# Altium PCB ZYL2(1).PcbDoc (part 2 of 2)
Units mm, origin at the board's own origin, x right, y up, seen from the top; angles counter-clockwise.
Board outline 152.4 x 101.6 mm, 2 copper layers (Top Layer, Bottom Layer); 55 components, 21 nets, 1137 pads, 477 vias.
Unrouted connection lines stored in the file: 165.
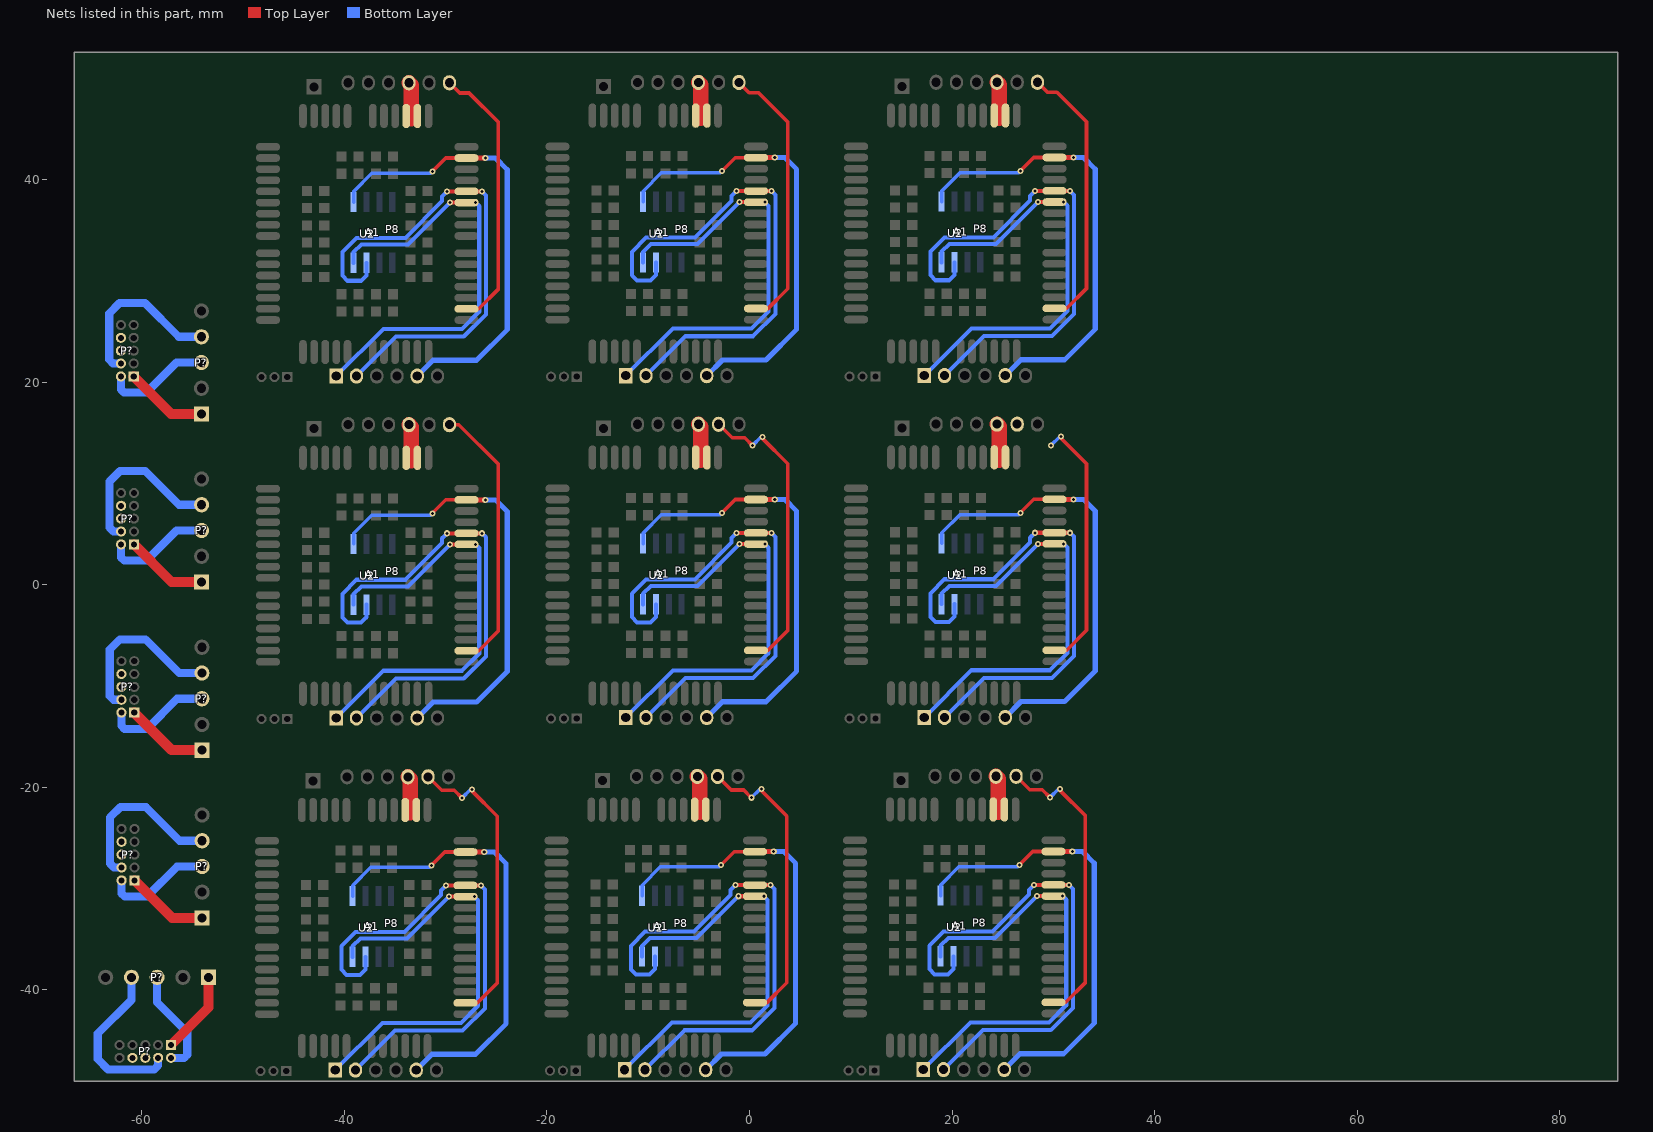
[diagram p2: the nets of this part, all layers, seen from the top]

## Via types
v1: diameter 0.65, hole 0.35, Top Layer to Bottom Layer, tented both sides, 377 vias
v2: diameter 0.6, hole 0.3, Top Layer to Bottom Layer, tented both sides, 100 vias

## Nets (pads, with @x,y where several pads share a name; then routed paths per layer and width w, separated by ;. In a path a pad name is that pad's centre, name@x,y a point inside that pad or via, vN(x,y) a via of type N, cw(c..) or ccw(c..) an arc to the next point about the centre after c; other vN are vias at no path point) (continued)
SIM_GND: A1.1 P8.5 U2.42 | length 401.7
  Top Layer w0.35: v2(-31.42,-27.717) -30.092,-26.389 U2.42@-28.046,-26.389 ; v2(-31.318,7.056) -29.991,8.384 U2.42@-27.945,8.384 ; v2(-31.318,40.813) -29.991,42.14 U2.42@-27.945,42.14 ; v2(-2.837,-27.681) -1.509,-26.354 U2.42@0.537,-26.354 ; v2(-2.735,7.091) -1.407,8.419 U2.42@0.639,8.419 ; v2(-2.735,40.848) -1.407,42.176 U2.42@0.639,42.176 ; v2(26.644,-27.666) 27.972,-26.338 U2.42@30.018,-26.338 ; v2(26.746,7.107) 28.074,8.435 U2.42@30.12,8.435 ; v2(26.746,40.863) 28.074,42.191 U2.42@30.12,42.191
  Top Layer w0.5: U2.42@-28.046,-26.389 v2(-26.195,-26.389) ; U2.42@-27.945,8.384 v2(-26.094,8.384) ; U2.42@-27.945,42.14 v2(-26.094,42.14) ; U2.42@0.537,-26.354 v2(2.388,-26.354) ; U2.42@0.639,8.419 v2(2.49,8.419) ; U2.42@0.639,42.176 v2(2.49,42.176) ; U2.42@30.018,-26.338 v2(31.869,-26.338) ; U2.42@30.12,8.435 v2(31.971,8.435) ; U2.42@30.12,42.191 v2(31.971,42.191)
  Bottom Layer w0.35: A1.1@-39.192,-30.739 -39.192,-29.698 -37.389,-27.894 -31.598,-27.894 v2(-31.42,-27.717) ; A1.1@-39.091,4.033 -39.091,5.075 -37.287,6.878 -31.496,6.878 v2(-31.318,7.056) ; A1.1@-39.091,37.79 -39.091,38.831 -37.287,40.635 -31.496,40.635 v2(-31.318,40.813) ; A1.1@-10.609,-30.704 -10.609,-29.663 -8.806,-27.859 -3.014,-27.859 v2(-2.837,-27.681) ; A1.1@-10.507,4.069 -10.507,5.11 -8.704,6.913 -2.913,6.913 v2(-2.735,7.091) ; A1.1@-10.507,37.825 -10.507,38.867 -8.704,40.67 -2.913,40.67 v2(-2.735,40.848) ; A1.1@18.872,-30.688 18.872,-29.647 20.675,-27.844 26.467,-27.844 v2(26.644,-27.666) ; A1.1@18.974,4.084 18.974,5.126 20.777,6.929 26.568,6.929 v2(26.746,7.107) ; A1.1@18.974,37.841 18.974,38.882 20.777,40.686 26.568,40.686 v2(26.746,40.863)
  Bottom Layer w0.5: P8.5@-32.913,-47.919 -31.354,-46.36 -27.051,-46.36 -24.029,-43.338 -24.029,-27.539 -25.179,-26.389 v2(-26.195,-26.389) ; P8.5@-32.811,-13.146 -31.253,-11.588 -26.95,-11.588 -23.927,-8.565 -23.927,7.234 -25.077,8.384 v2(-26.094,8.384) ; P8.5@-32.811,20.61 -31.253,22.169 -26.95,22.169 -23.927,25.192 -23.927,40.99 -25.077,42.14 v2(-26.094,42.14) ; P8.5@-4.33,-47.884 -2.771,-46.325 1.532,-46.325 4.555,-43.302 4.555,-27.504 3.405,-26.354 v2(2.388,-26.354) ; P8.5@-4.228,-13.111 -2.669,-11.552 1.634,-11.552 4.656,-8.53 4.656,7.269 3.506,8.419 v2(2.49,8.419) ; P8.5@-4.228,20.645 -2.669,22.204 1.634,22.204 4.656,25.227 4.656,41.026 3.506,42.176 v2(2.49,42.176) ; P8.5@25.151,-47.868 26.71,-46.309 31.013,-46.309 34.036,-43.287 34.036,-27.488 32.886,-26.338 v2(31.869,-26.338) ; P8.5@25.253,-13.096 26.812,-11.537 31.115,-11.537 34.137,-8.514 34.137,7.285 32.987,8.435 v2(31.971,8.435) ; P8.5@25.253,20.661 26.812,22.22 31.115,22.22 34.137,25.242 34.137,41.041 32.987,42.191 v2(31.971,42.191)
SIM_RST: A1.7 P8.2 U2.39 | length 454.7
  Top Layer w0.4: v2(-29.963,-29.689) U2.39@-28.046,-29.689 v2(-26.527,-29.689) ; v2(-29.862,5.084) U2.39@-27.945,5.084 v2(-26.425,5.084) ; v2(-29.862,38.84) U2.39@-27.945,38.84 v2(-26.425,38.84) ; v2(-1.38,-29.654) U2.39@0.537,-29.654 v2(2.057,-29.654) ; v2(-1.278,5.119) U2.39@0.639,5.119 v2(2.158,5.119) ; v2(-1.278,38.876) U2.39@0.639,38.876 v2(2.158,38.876) ; v2(28.101,-29.638) U2.39@30.018,-29.638 v2(31.538,-29.638) ; v2(28.203,5.135) U2.39@30.12,5.135 v2(31.639,5.135) ; v2(28.203,38.891) U2.39@30.12,38.891 v2(31.639,38.891)
  Bottom Layer w0.4: P8.2@-38.913,-47.919 -35.017,-44.023 -28.321,-44.023 -26.137,-41.839 -26.137,-30.079 v2(-26.527,-29.689) ; P8.2@-38.811,-13.146 -34.916,-9.251 -28.22,-9.251 -26.035,-7.066 -26.035,4.694 v2(-26.425,5.084) ; P8.2@-38.811,20.61 -34.916,24.506 -28.22,24.506 -26.035,26.69 -26.035,38.45 v2(-26.425,38.84) ; A1.7@-37.922,-36.739 -37.922,-37.978 -38.456,-38.512 -39.802,-38.512 -40.31,-38.004 -40.31,-35.692 -38.894,-34.276 -34.079,-34.276 -30.455,-30.653 -30.455,-30.18 v2(-29.963,-29.689) ; A1.7@-37.821,-1.967 -37.821,-3.206 -38.354,-3.739 -39.7,-3.739 -40.208,-3.231 -40.208,-0.92 -38.792,0.496 -33.977,0.496 -30.353,4.12 -30.353,4.592 v2(-29.862,5.084) ; A1.7@-37.821,31.79 -37.821,30.551 -38.354,30.018 -39.7,30.018 -40.208,30.526 -40.208,32.837 -38.792,34.253 -33.977,34.253 -30.353,37.877 -30.353,38.349 v2(-29.862,38.84) ; P8.2@-10.33,-47.884 -6.434,-43.988 0.262,-43.988 2.447,-41.804 2.447,-30.044 v2(2.057,-29.654) ; P8.2@-10.228,-13.111 -6.332,-9.216 0.364,-9.216 2.548,-7.031 2.548,4.729 v2(2.158,5.119) ; P8.2@-10.228,20.645 -6.332,24.541 0.364,24.541 2.548,26.725 2.548,38.486 v2(2.158,38.876) ; A1.7@-9.339,-36.704 -9.339,-37.943 -9.872,-38.476 -11.219,-38.476 -11.727,-37.968 -11.727,-35.657 -10.311,-34.241 -5.495,-34.241 -1.871,-30.617 -1.871,-30.145 v2(-1.38,-29.654) ; A1.7@-9.237,-1.931 -9.237,-3.17 -9.771,-3.704 -11.117,-3.704 -11.625,-3.196 -11.625,-0.884 -10.209,0.532 -5.393,0.532 -1.77,4.155 -1.77,4.627 v2(-1.278,5.119) ; A1.7@-9.237,31.825 -9.237,30.586 -9.771,30.053 -11.117,30.053 -11.625,30.561 -11.625,32.872 -10.209,34.288 -5.393,34.288 -1.77,37.912 -1.77,38.384 v2(-1.278,38.876) ; P8.2@19.151,-47.868 23.047,-43.973 29.743,-43.973 31.928,-41.788 31.928,-30.028 v2(31.538,-29.638) ; P8.2@19.253,-13.096 23.149,-9.2 29.845,-9.2 32.029,-7.016 32.029,4.745 v2(31.639,5.135) ; P8.2@19.253,20.661 23.149,24.557 29.845,24.557 32.029,26.741 32.029,38.501 v2(31.639,38.891) ; A1.7@20.142,-36.688 20.142,-37.927 19.609,-38.461 18.262,-38.461 17.754,-37.953 17.754,-35.641 19.17,-34.225 23.986,-34.225 27.61,-30.602 27.61,-30.13 v2(28.101,-29.638) ; A1.7@20.244,-1.916 20.244,-3.155 19.71,-3.688 18.364,-3.688 17.856,-3.18 17.856,-0.869 19.272,0.547 24.087,0.547 27.711,4.171 27.711,4.643 v2(28.203,5.135) ; A1.7@20.244,31.841 20.244,30.602 19.71,30.068 18.364,30.068 17.856,30.576 17.856,32.888 19.272,34.304 24.087,34.304 27.711,37.928 27.711,38.4 v2(28.203,38.891)
SIM_VCC: A1.8 P8.1 U2.38 | length 377.1
  Top Layer w0.4: v2(-29.666,-30.789) U2.38@-28.046,-30.789 ; v2(-29.565,3.984) U2.38@-27.945,3.984 ; v2(-29.565,37.74) U2.38@-27.945,37.74 ; v2(-1.083,-30.754) U2.38@0.537,-30.754 ; v2(-0.981,4.019) U2.38@0.639,4.019 ; v2(-0.981,37.776) U2.38@0.639,37.776 ; v2(28.398,-30.738) U2.38@30.018,-30.738 ; v2(28.5,4.035) U2.38@30.12,4.035 ; v2(28.5,37.791) U2.38@30.12,37.791
  Bottom Layer w0.4: P8.1@-40.913,-47.919 -36.255,-43.261 -28.484,-43.261 -26.791,-41.568 -26.791,-31.152 v2(-27.153,-30.79) ; P8.1@-40.811,-13.146 -36.154,-8.489 -28.383,-8.489 -26.689,-6.795 -26.689,3.621 v2(-27.051,3.983) ; P8.1@-40.811,20.61 -36.154,25.268 -28.383,25.268 -26.689,26.961 -26.689,37.377 v2(-27.051,37.739) ; A1.8@-39.192,-36.739 -39.192,-35.692 -38.43,-34.93 -33.808,-34.93 v2(-29.666,-30.789) ; A1.8@-39.091,-1.967 -39.091,-0.92 -38.329,-0.158 -33.706,-0.158 v2(-29.565,3.984) ; A1.8@-39.091,31.79 -39.091,32.837 -38.329,33.599 -33.706,33.599 v2(-29.565,37.74) ; P8.1@-12.33,-47.884 -7.672,-43.226 0.099,-43.226 1.793,-41.533 1.793,-31.117 v2(1.431,-30.755) ; P8.1@-12.228,-13.111 -7.57,-8.454 0.201,-8.454 1.894,-6.76 1.894,3.656 v2(1.532,4.018) ; P8.1@-12.228,20.645 -7.57,25.303 0.201,25.303 1.894,26.996 1.894,37.412 v2(1.532,37.774) ; A1.8@-10.609,-36.704 -10.609,-35.657 -9.847,-34.895 -5.224,-34.895 v2(-1.083,-30.754) ; A1.8@-10.507,-1.931 -10.507,-0.884 -9.745,-0.122 -5.123,-0.122 v2(-0.981,4.019) ; A1.8@-10.507,31.825 -10.507,32.872 -9.745,33.634 -5.123,33.634 v2(-0.981,37.776) ; P8.1@17.151,-47.868 21.809,-43.211 29.58,-43.211 31.274,-41.517 31.274,-31.101 v2(30.912,-30.739) ; P8.1@17.253,-13.096 21.911,-8.438 29.682,-8.438 31.375,-6.745 31.375,3.671 v2(31.013,4.033) ; P8.1@17.253,20.661 21.911,25.319 29.682,25.319 31.375,27.012 31.375,37.428 v2(31.013,37.79) ; A1.8@18.872,-36.688 18.872,-35.641 19.634,-34.879 24.257,-34.879 v2(28.398,-30.738) ; A1.8@18.974,-1.916 18.974,-0.869 19.736,-0.107 24.358,-0.107 v2(28.5,4.035) ; A1.8@18.974,31.841 18.974,32.888 19.736,33.65 24.358,33.65 v2(28.5,37.791)
SWCLK: P?.4 | length 83.8
  Bottom Layer w0.8: P?.4@-62.078,21.844 -62.84,21.844 -63.221,22.225 -63.221,26.797 -62.205,27.813 -59.69,27.813 -56.363,24.486 P?.4@-54.127,24.486 ; P?.4@-62.052,5.258 -62.814,5.258 -63.195,5.639 -63.195,10.211 -62.179,11.227 -59.665,11.227 -56.337,7.899 P?.4@-54.102,7.899 ; P?.4@-62.027,-11.354 -62.789,-11.354 -63.17,-10.973 -63.17,-6.401 -62.154,-5.385 -59.639,-5.385 -56.312,-8.712 P?.4@-54.077,-8.712 ; P?.4@-62.001,-27.915 -62.763,-27.915 -63.144,-27.534 -63.144,-22.962 -62.128,-21.946 -59.614,-21.946 -56.286,-25.273 P?.4@-54.051,-25.273 ; P?.4@-61.036,-38.76 -61.036,-40.996 -64.364,-44.323 -64.364,-46.838 -63.348,-47.854 -58.776,-47.854 -58.395,-47.473 P?.4@-58.395,-46.711
SWDIO: P?.2@-57.125,-46.711 P?.2@-62.001,-29.185 P?.2@-62.027,-12.624 P?.2@-62.052,3.988 P?.2@-62.078,20.574 P?.3@-54.051,-27.813 P?.3@-54.077,-11.252 P?.3@-54.102,5.359 P?.3@-54.127,21.946 P?.3@-58.496,-38.76 | length 53
  Bottom Layer w0.8: P?.2@-62.078,20.574 -62.078,19.279 -61.773,18.974 -59.563,18.974 -56.591,21.946 P?.3@-54.127,21.946 ; P?.2@-62.052,3.988 -62.052,2.692 -61.747,2.388 -59.538,2.388 -56.566,5.359 P?.3@-54.102,5.359 ; P?.2@-62.027,-12.624 -62.027,-13.919 -61.722,-14.224 -59.512,-14.224 -56.54,-11.252 P?.3@-54.077,-11.252 ; P?.2@-62.001,-29.185 -62.001,-30.48 -61.697,-30.785 -59.487,-30.785 -56.515,-27.813 P?.3@-54.051,-27.813 ; P?.3@-58.496,-38.76 -58.496,-41.224 -55.524,-44.196 -55.524,-46.406 -55.829,-46.711 P?.2@-57.125,-46.711
SWO: P?.6
TDI: P?.8
TX: P8.7@28.428,49.617 P8.7@-1.053,49.601 P8.7@-29.636,15.81 P8.7@-29.636,49.566 P8.8@26.326,-18.912 P8.8@26.428,15.86 P8.8@-3.053,15.845 P8.8@-3.155,-18.928 P8.8@-31.738,-18.963 U2.29 | length 251.8
  Top Layer w0.35: P8.8@-31.738,-18.963 -30.401,-20.301 -29.159,-20.301 v2(-28.397,-21.062) ; P8.7@-29.636,15.81 -28.7,15.81 -24.793,11.903 -24.793,-4.554 -26.755,-6.516 U2.29@-27.945,-6.516 ; P8.7@-29.636,49.566 -28.631,48.56 -27.694,48.56 -24.793,45.66 -24.793,29.202 -26.755,27.24 U2.29@-27.945,27.24 ; U2.29@-28.046,-41.289 -26.857,-41.289 -24.895,-39.327 -24.895,-22.87 -27.407,-20.358 v2(-27.407,-20.198) ; P8.8@-3.155,-18.928 -1.817,-20.265 -0.575,-20.265 v2(0.186,-21.027) ; P8.8@-3.053,15.845 -1.716,14.507 -0.474,14.507 v2(0.288,13.746) ; P8.7@-1.053,49.601 -0.047,48.596 0.889,48.596 3.79,45.695 3.79,29.237 1.828,27.276 U2.29@0.639,27.276 ; U2.29@0.537,-41.254 1.727,-41.254 3.689,-39.292 3.689,-22.834 1.177,-20.322 v2(1.177,-20.163) ; U2.29@0.639,-6.481 1.828,-6.481 3.79,-4.519 3.79,11.938 1.278,14.45 v2(1.278,14.61) ; P8.8@26.326,-18.912 27.664,-20.25 28.906,-20.25 v2(29.667,-21.011) ; P8.7@28.428,49.617 29.416,48.629 30.353,48.629 33.271,45.71 33.271,29.253 31.309,27.291 U2.29@30.12,27.291 ; U2.29@30.018,-41.238 31.208,-41.238 33.17,-39.276 33.17,-22.819 30.658,-20.307 v2(30.658,-20.147) ; U2.29@30.12,-6.465 31.309,-6.465 33.271,-4.504 33.271,11.954 30.759,14.466 v2(30.759,14.625)
  Bottom Layer w0.35: v2(-28.397,-21.062) -27.534,-20.198 v2(-27.407,-20.198) ; v2(0.186,-21.027) 1.05,-20.163 v2(1.177,-20.163) ; v2(0.288,13.746) 1.151,14.61 v2(1.278,14.61) ; v2(29.667,-21.011) 30.531,-20.147 v2(30.658,-20.147) ; v2(29.769,13.762) 30.632,14.625 v2(30.759,14.625)
VCC: P8.9 U2.45 U2.46 | length 33
  Top Layer w1.5: P8.9@-33.738,-18.963 -33.503,-19.198 -33.503,-22.535 ; P8.9@-33.636,15.81 -33.401,15.574 -33.401,12.238 ; P8.9@-33.636,49.566 -33.401,49.331 -33.401,45.994 ; P8.9@-5.155,-18.928 -4.919,-19.163 -4.919,-22.5 ; P8.9@-5.053,15.845 -4.818,15.61 -4.818,12.273 ; P8.9@-5.053,49.601 -4.818,49.366 -4.818,46.029 ; P8.9@24.326,-18.912 24.562,-19.147 24.562,-22.484 ; P8.9@24.428,15.86 24.663,15.625 24.663,12.288 ; P8.9@24.428,49.617 24.663,49.382 24.663,46.045
Vref: P?.1 | length 41.1
  Top Layer w1: P?.1@-60.808,20.574 -57.099,16.866 P?.1@-54.127,16.866 ; P?.1@-60.782,3.988 -57.074,0.279 P?.1@-54.102,0.279 ; P?.1@-60.757,-12.624 -57.048,-16.332 P?.1@-54.077,-16.332 ; P?.1@-60.731,-29.185 -57.023,-32.893 P?.1@-54.051,-32.893 ; P?.1@-57.125,-45.441 -53.416,-41.732 P?.1@-53.416,-38.76
pads on no net: A1.2 A1.4 A1.5 P8.6 P8.12 P?.7 U2.1 U2.3 U2.4 U2.5 U2.6 U2.7 U2.8 U2.9 U2.10 U2.11 U2.12 U2.13 U2.14 U2.16 U2.17 U2.18 U2.21 U2.22 U2.23 U2.24 U2.25 U2.26 U2.27 U2.28 U2.31 U2.32 U2.33 U2.34 U2.35 U2.36 U2.37 U2.44 U2.49 U2.50 U2.55 U2.56 U2.57 U2.58 U2.67 U2.68 U2.69 U2.70 U2.75 U2.76 U2.77 U2.78 U2.79 U2.80 U2.84 U2.85 U2.86 U2.87 U2.88 U2.89 U2.90 U2.91

## Polygon pours and split planes (outlines as drawn)
GND on Top Layer "Top Layer-GND 1" (solid, remove dead copper, pour order 56): -49.098,19.552 -49.098,50.566 cw(c-49.047,50.622) -49.048,50.698 -23.218,50.825 cw(c-23.217,50.75) -23.142,50.75 cw(c-23.217,50.75) -23.142,50.75 -23.217,19.629 cw(c-23.292,19.629) -23.348,19.579 -48.997,19.579 -48.997,19.552 cw(c-49.047,19.552)
GND on Top Layer "Top Layer-GND 2" (solid, remove dead copper, pour order 80): -64.313,29.159 -52.553,29.159 -52.553,15.215 -64.313,15.215
GND on Top Layer "Top Layer-GND 2" (solid, remove dead copper, pour order 76): -64.287,12.573 -52.527,12.573 -52.527,-1.372 -64.287,-1.372
GND on Top Layer "Top Layer-GND 2" (solid, remove dead copper, pour order 72): -64.262,-4.039 -52.502,-4.039 -52.502,-17.983 -64.262,-17.983
GND on Top Layer "Top Layer-GND 2" (solid, remove dead copper, pour order 68): -64.237,-20.599 -52.476,-20.599 -52.476,-34.544 -64.237,-34.544
GND on Top Layer "Top Layer-GND 1" (solid, remove dead copper, pour order 54): -20.514,19.587 -20.514,50.601 cw(c-20.464,50.657) -20.464,50.733 5.366,50.86 cw(c5.366,50.785) 5.441,50.785 cw(c5.366,50.785) 5.441,50.785 5.367,19.664 cw(c5.291,19.664) 5.235,19.614 -20.414,19.614 -20.414,19.587 cw(c-20.464,19.587)
GND on Top Layer "Top Layer-GND 1" (solid, remove dead copper, pour order 52): 8.967,19.603 8.967,50.617 cw(c9.017,50.673) 9.017,50.748 34.847,50.876 cw(c34.847,50.801) 34.922,50.801 cw(c34.847,50.801) 34.922,50.8 34.848,19.68 cw(c34.772,19.68) 34.716,19.629 9.067,19.629 9.067,19.603 cw(c9.017,19.603)
GND on Top Layer "Top Layer-GND 1" (solid, remove dead copper, pour order 44): -49.098,-14.204 -49.098,16.81 cw(c-49.047,16.866) -49.048,16.941 -23.218,17.069 cw(c-23.217,16.993) -23.142,16.993 cw(c-23.217,16.993) -23.142,16.993 -23.217,-14.128 cw(c-23.292,-14.128) -23.348,-14.178 -48.997,-14.178 -48.997,-14.204 cw(c-49.047,-14.204)
GND on Top Layer "Top Layer-GND 1" (solid, remove dead copper, pour order 42): -20.514,-14.169 -20.514,16.845 cw(c-20.464,16.901) -20.464,16.976 5.366,17.104 cw(c5.366,17.028) 5.441,17.028 cw(c5.366,17.028) 5.441,17.028 5.367,-14.092 cw(c5.291,-14.092) 5.235,-14.143 -20.414,-14.143 -20.414,-14.169 cw(c-20.464,-14.169)
GND on Top Layer "Top Layer-GND 1" (solid, remove dead copper, pour order 40): 8.967,-14.154 8.967,16.86 cw(c9.017,16.916) 9.017,16.992 34.847,17.119 cw(c34.847,17.044) 34.922,17.044 cw(c34.847,17.044) 34.922,17.044 34.848,-14.077 cw(c34.772,-14.077) 34.716,-14.127 9.067,-14.127 9.067,-14.154 cw(c9.017,-14.154)
GND on Top Layer "Top Layer-GND 1" (solid, remove dead copper, pour order 24): 8.865,-48.926 8.865,-17.912 cw(c8.915,-17.856) 8.915,-17.781 34.745,-17.653 cw(c34.745,-17.729) 34.821,-17.729 cw(c34.745,-17.729) 34.821,-17.729 34.746,-48.85 cw(c34.671,-48.849) 34.615,-48.9 8.966,-48.9 8.966,-48.926 cw(c8.915,-48.926)
GND on Top Layer "Top Layer-GND 1" (solid, remove dead copper, pour order 16): -20.616,-48.942 -20.616,-17.928 cw(c-20.566,-17.872) -20.566,-17.796 5.264,-17.669 cw(c5.264,-17.744) 5.34,-17.744 cw(c5.264,-17.744) 5.34,-17.744 5.265,-48.865 cw(c5.19,-48.865) 5.134,-48.915 -20.515,-48.915 -20.515,-48.942 cw(c-20.566,-48.942)
GND on Top Layer "Top Layer-GND 1" (solid, remove dead copper, pour order 12): -49.199,-48.977 -49.199,-17.963 cw(c-49.149,-17.907) -49.149,-17.832 -23.319,-17.704 cw(c-23.319,-17.78) -23.244,-17.78 cw(c-23.319,-17.78) -23.244,-17.78 -23.318,-48.9 cw(c-23.394,-48.9) -23.45,-48.951 -49.099,-48.951 -49.099,-48.977 cw(c-49.149,-48.977)
GND on Top Layer "Top Layer-GND 2" (solid, remove dead copper, pour order 0): -65.71,-48.946 -65.71,-37.186 -51.765,-37.186 -51.765,-48.946
GND on Bottom Layer "Bottom Layer-GND 1" (hatched Horizontal grid 0.13 track 0.14, remove dead copper, pour order 62): -49.098,19.552 -49.098,50.566 cw(c-49.047,50.622) -49.048,50.698 -23.218,50.825 cw(c-23.217,50.75) -23.142,50.75 cw(c-23.217,50.75) -23.142,50.75 -23.217,19.629 cw(c-23.292,19.629) -23.348,19.579 -48.997,19.579 -48.997,19.552 cw(c-49.047,19.552)
GND on Bottom Layer "Bottom Layer-GND" (solid, remove dead copper, pour order 82): -64.313,29.159 -52.553,29.159 -52.553,15.215 -64.313,15.215
GND on Bottom Layer "Bottom Layer-GND" (solid, remove dead copper, pour order 78): -64.287,12.573 -52.527,12.573 -52.527,-1.372 -64.287,-1.372
GND on Bottom Layer "Bottom Layer-GND" (solid, remove dead copper, pour order 74): -64.262,-4.039 -52.502,-4.039 -52.502,-17.983 -64.262,-17.983
GND on Bottom Layer "Bottom Layer-GND" (solid, remove dead copper, pour order 70): -64.237,-20.599 -52.476,-20.599 -52.476,-34.544 -64.237,-34.544
GND on Bottom Layer "Bottom Layer-GND 1" (hatched Horizontal grid 0.13 track 0.14, remove dead copper, pour order 60): -20.514,19.587 -20.514,50.601 cw(c-20.464,50.657) -20.464,50.733 5.366,50.86 cw(c5.366,50.785) 5.441,50.785 cw(c5.366,50.785) 5.441,50.785 5.367,19.664 cw(c5.291,19.664) 5.235,19.614 -20.414,19.614 -20.414,19.587 cw(c-20.464,19.587)
GND on Bottom Layer "Bottom Layer-GND 1" (hatched Horizontal grid 0.13 track 0.14, remove dead copper, pour order 58): 8.967,19.603 8.967,50.617 cw(c9.017,50.673) 9.017,50.748 34.847,50.876 cw(c34.847,50.801) 34.922,50.801 cw(c34.847,50.801) 34.922,50.8 34.848,19.68 cw(c34.772,19.68) 34.716,19.629 9.067,19.629 9.067,19.603 cw(c9.017,19.603)
GND on Bottom Layer "Bottom Layer-GND 1" (hatched Horizontal grid 0.13 track 0.14, remove dead copper, pour order 50): -49.098,-14.204 -49.098,16.81 cw(c-49.047,16.866) -49.048,16.941 -23.218,17.069 cw(c-23.217,16.993) -23.142,16.993 cw(c-23.217,16.993) -23.142,16.993 -23.217,-14.128 cw(c-23.292,-14.128) -23.348,-14.178 -48.997,-14.178 -48.997,-14.204 cw(c-49.047,-14.204)
GND on Bottom Layer "Bottom Layer-GND 1" (hatched Horizontal grid 0.13 track 0.14, remove dead copper, pour order 48): -20.514,-14.169 -20.514,16.845 cw(c-20.464,16.901) -20.464,16.976 5.366,17.104 cw(c5.366,17.028) 5.441,17.028 cw(c5.366,17.028) 5.441,17.028 5.367,-14.092 cw(c5.291,-14.092) 5.235,-14.143 -20.414,-14.143 -20.414,-14.169 cw(c-20.464,-14.169)
GND on Bottom Layer "Bottom Layer-GND 1" (hatched Horizontal grid 0.13 track 0.14, remove dead copper, pour order 46): 8.967,-14.154 8.967,16.86 cw(c9.017,16.916) 9.017,16.992 34.847,17.119 cw(c34.847,17.044) 34.922,17.044 cw(c34.847,17.044) 34.922,17.044 34.848,-14.077 cw(c34.772,-14.077) 34.716,-14.127 9.067,-14.127 9.067,-14.154 cw(c9.017,-14.154)
GND on Bottom Layer "Bottom Layer-GND 1" (hatched Horizontal grid 0.13 track 0.14, remove dead copper, pour order 26): 8.865,-48.926 8.865,-17.912 cw(c8.915,-17.856) 8.915,-17.781 34.745,-17.653 cw(c34.745,-17.729) 34.821,-17.729 cw(c34.745,-17.729) 34.821,-17.729 34.746,-48.85 cw(c34.671,-48.849) 34.615,-48.9 8.966,-48.9 8.966,-48.926 cw(c8.915,-48.926)
GND on Bottom Layer "Bottom Layer-GND 1" (hatched Horizontal grid 0.13 track 0.14, remove dead copper, pour order 18): -20.616,-48.942 -20.616,-17.928 cw(c-20.566,-17.872) -20.566,-17.796 5.264,-17.669 cw(c5.264,-17.744) 5.34,-17.744 cw(c5.264,-17.744) 5.34,-17.744 5.265,-48.865 cw(c5.19,-48.865) 5.134,-48.915 -20.515,-48.915 -20.515,-48.942 cw(c-20.566,-48.942)
GND on Bottom Layer "Bottom Layer-GND 1" (hatched Horizontal grid 0.13 track 0.14, remove dead copper, pour order 14): -49.199,-48.977 -49.199,-17.963 cw(c-49.149,-17.907) -49.149,-17.832 -23.319,-17.704 cw(c-23.319,-17.78) -23.244,-17.78 cw(c-23.319,-17.78) -23.244,-17.78 -23.318,-48.9 cw(c-23.394,-48.9) -23.45,-48.951 -49.099,-48.951 -49.099,-48.977 cw(c-49.149,-48.977)
GND on Bottom Layer "Bottom Layer-GND" (solid, remove dead copper, pour order 2): -65.71,-48.946 -65.71,-37.186 -51.765,-37.186 -51.765,-48.946

## Keep-outs
Keep-Out Layer:
  lines w0.1: -65.71,-37.186 -65.71,-48.946 -51.765,-48.946 -51.765,-42.164 -49.174,-42.164 -49.174,-48.977 -49.149,-48.977 -48.387,-48.977 ; -65.71,-37.135 -57.455,-37.135 -57.455,-34.544 -64.237,-34.544 -64.237,-20.599 ; -64.287,12.573 -64.287,-1.372 -57.506,-1.372 -57.506,-3.962 -64.262,-3.962 ; -64.287,12.624 -57.531,12.624 -57.531,15.215 -64.313,15.215 -64.313,29.159 -52.553,29.159 -52.553,15.215 -52.527,12.573 -52.527,-1.372 -52.502,-4.039 -52.502,-17.983 -52.476,-20.599 -52.476,-34.544 -52.476,-37.186 -51.765,-37.186 -49.098,-37.186 -49.098,-17.907 -49.047,-17.907 ; -64.262,-4.039 -64.262,-17.983 -57.48,-17.983 -57.48,-20.574 -64.237,-20.574 ; -49.149,-46.971 -49.149,-48.9 -23.394,-48.9 ; -49.149,-17.907 -49.047,-17.907 ; -49.047,-12.198 -49.047,-14.128 -49.047,-17.907 ; -49.047,21.559 -49.047,19.629 -49.047,16.866 -49.047,-14.204 -48.285,-14.204 ; -49.047,50.622 -49.047,19.552 -48.285,19.552 ; -23.394,-48.942 -20.566,-48.942 -19.804,-48.942 ; -23.292,47.854 -23.292,19.629 -44.526,19.629 -44.526,16.888 -23.153,16.888 ; -23.259,-0.229 -20.472,-0.229 ; -23.251,47.854 -20.498,47.854 -20.498,19.664 ; -23.246,4.851 -20.472,4.851 ; -23.228,-14.128 -44.78,-14.128 -44.78,-17.872 -23.319,-17.872 -23.319,-45.339 -23.385,-45.339 -20.566,-45.339 -20.566,-17.872 ; -23.217,50.75 -20.464,50.75 ; -20.566,-46.935 -20.566,-48.865 5.19,-48.865 8.915,-48.865 ; -20.464,-12.163 -20.464,-14.092 5.291,-14.092 ; -20.464,-0.229 -20.464,-14.169 -19.702,-14.169 ; -20.464,4.851 -20.464,16.901 ; -20.464,16.916 -10.744,16.916 -10.744,19.609 -20.464,19.609 -20.464,21.594 -20.464,19.664 ; -20.464,19.587 -19.702,19.587 ; 5.264,-17.744 5.264,-42.977 5.204,-42.977 8.915,-42.977 8.915,-17.729 ; 5.366,17.028 -3.353,17.028 -3.353,16.942 -3.353,19.629 -3.353,19.664 5.356,19.664 5.356,46.787 9.017,46.787 9.017,19.603 9.779,19.603 ; 5.366,50.785 8.12,50.785 9.017,50.785 9.017,50.673 ; 8.915,-48.926 9.677,-48.926 ; 8.915,-46.92 8.915,-48.849 34.671,-48.849 ; 8.915,-17.856 8.915,-17.729 ; 9.017,21.61 9.017,19.68 ; 9.017,21.996 9.017,19.68 ; 9.779,-14.154 9.017,-14.154 9.017,16.916 9.017,17.027 31.369,17.027 ; 31.344,17.027 31.369,17.027 ; 34.745,-17.729 34.745,-14.077 ; 34.772,19.68 34.847,19.68 34.847,17.044 ; 8.915,-17.729 30.937,-17.729 30.937,-14.077 9.017,-14.077 ; 9.017,-14.077 9.017,-12.147 9.017,-14.077 ; 9.017,19.68 31.369,19.68 31.369,17.027
  lines w0.15: -49.047,50.622 -23.217,50.75 ; -23.228,-14.128 -23.194,-0.229 ; -23.182,4.851 -23.153,16.888 ; -20.566,-17.872 5.264,-17.744 ; -20.464,50.657 5.366,50.785 ; 5.291,-14.092 5.366,17.028 ; 9.017,50.673 34.847,50.801 34.772,19.68 ; 34.671,-48.849 34.745,-17.729 ; 34.772,-14.077 34.847,17.044

## Other copper
Top Layer:
  rectangle net NetE1_1: -43.358,46.171 -42.621,49.215
  rectangle net NetE1_1: -14.774,46.207 -14.038,49.251
  rectangle net NetE1_1: 14.707,46.222 15.443,49.266
  rectangle net NetE1_1: -43.358,12.415 -42.621,15.459
  rectangle net NetE1_1: -14.774,12.45 -14.038,15.494
  rectangle net NetE1_1: 14.707,12.466 15.443,15.51
  rectangle net NetE1_1: 14.605,-22.307 15.342,-19.263
  rectangle net NetE1_1: -14.876,-22.323 -14.139,-19.279
  rectangle net NetE1_1: -43.459,-22.358 -42.723,-19.314
  pour cut-out: -38.8,50.693 -38.8,45.143 -39.395,44.547 -49.046,44.547 -49.047,44.546 -49.047,50.622 -38.938,50.622 -38.887,50.672
  pour cut-out: -10.216,50.728 -10.216,45.178 -10.812,44.583 -20.462,44.583 -20.464,44.581 -20.464,50.657 -10.354,50.657 -10.304,50.708
  pour cut-out: 19.264,50.743 19.264,45.194 18.669,44.598 9.018,44.598 9.017,44.597 9.017,50.673 19.127,50.673 19.177,50.723
  pour cut-out: -38.8,16.936 -38.8,11.386 -39.395,10.791 -49.046,10.791 -49.047,10.789 -49.047,16.866 -38.938,16.866 -38.887,16.916
  pour cut-out: -10.216,16.971 -10.216,11.421 -10.812,10.826 -20.462,10.826 -20.464,10.824 -20.464,16.901 -10.354,16.901 -10.304,16.951
  pour cut-out: 19.264,16.987 19.264,11.437 18.669,10.841 9.018,10.841 9.017,10.84 9.017,16.916 19.127,16.916 19.177,16.967
  pour cut-out: 19.163,-17.786 19.163,-23.336 18.567,-23.931 8.917,-23.931 8.915,-23.933 8.915,-17.856 19.025,-17.856 19.075,-17.806
  pour cut-out: -10.318,-17.801 -10.318,-23.351 -10.914,-23.947 -20.564,-23.947 -20.566,-23.948 -20.566,-17.872 -10.456,-17.872 -10.406,-17.822
  pour cut-out: -38.902,-17.837 -38.902,-23.387 -39.497,-23.982 -49.148,-23.982 -49.149,-23.984 -49.149,-17.907 -39.039,-17.907 -38.989,-17.857
Bottom Layer:
  pour cut-out: -38.8,50.693 -38.8,45.143 -39.395,44.547 -49.046,44.547 -49.047,44.546 -49.047,50.622 -38.938,50.622 -38.887,50.672
  pour cut-out: -10.216,50.728 -10.216,45.178 -10.812,44.583 -20.462,44.583 -20.464,44.581 -20.464,50.657 -10.354,50.657 -10.304,50.708
  pour cut-out: 19.264,50.743 19.264,45.194 18.669,44.598 9.018,44.598 9.017,44.597 9.017,50.673 19.127,50.673 19.177,50.723
  pour cut-out: -38.8,16.936 -38.8,11.386 -39.395,10.791 -49.046,10.791 -49.047,10.789 -49.047,16.866 -38.938,16.866 -38.887,16.916
  pour cut-out: -10.216,16.971 -10.216,11.421 -10.812,10.826 -20.462,10.826 -20.464,10.824 -20.464,16.901 -10.354,16.901 -10.304,16.951
  pour cut-out: 19.264,16.987 19.264,11.437 18.669,10.841 9.018,10.841 9.017,10.84 9.017,16.916 19.127,16.916 19.177,16.967
  pour cut-out: 19.163,-17.786 19.163,-23.336 18.567,-23.931 8.917,-23.931 8.915,-23.933 8.915,-17.856 19.025,-17.856 19.075,-17.806
  pour cut-out: -10.318,-17.801 -10.318,-23.351 -10.914,-23.947 -20.564,-23.947 -20.566,-23.948 -20.566,-17.872 -10.456,-17.872 -10.406,-17.822
  pour cut-out: -38.902,-17.837 -38.902,-23.387 -39.497,-23.982 -49.148,-23.982 -49.149,-23.984 -49.149,-17.907 -39.039,-17.907 -38.989,-17.857

## Text inside footprints (layer, text, board x,y; h text height)
P?: Top Overlay "9" at -60.3,27.074 h1 r90; Top Overlay "1" at -60.3,18.974 h1 r90
P?: Top Overlay "9" at -60.274,10.488 h1 r90; Top Overlay "1" at -60.274,2.388 h1 r90
P?: Top Overlay "9" at -60.249,-6.124 h1 r90; Top Overlay "1" at -60.249,-14.224 h1 r90
P?: Top Overlay "9" at -60.223,-22.685 h1 r90; Top Overlay "1" at -60.223,-30.785 h1 r90
P?: Top Overlay "1" at -55.525,-44.933 h1 r180; Top Overlay "9" at -63.625,-44.933 h1 r180